# EAGLE board carberry01 (EAGLE 6.4)
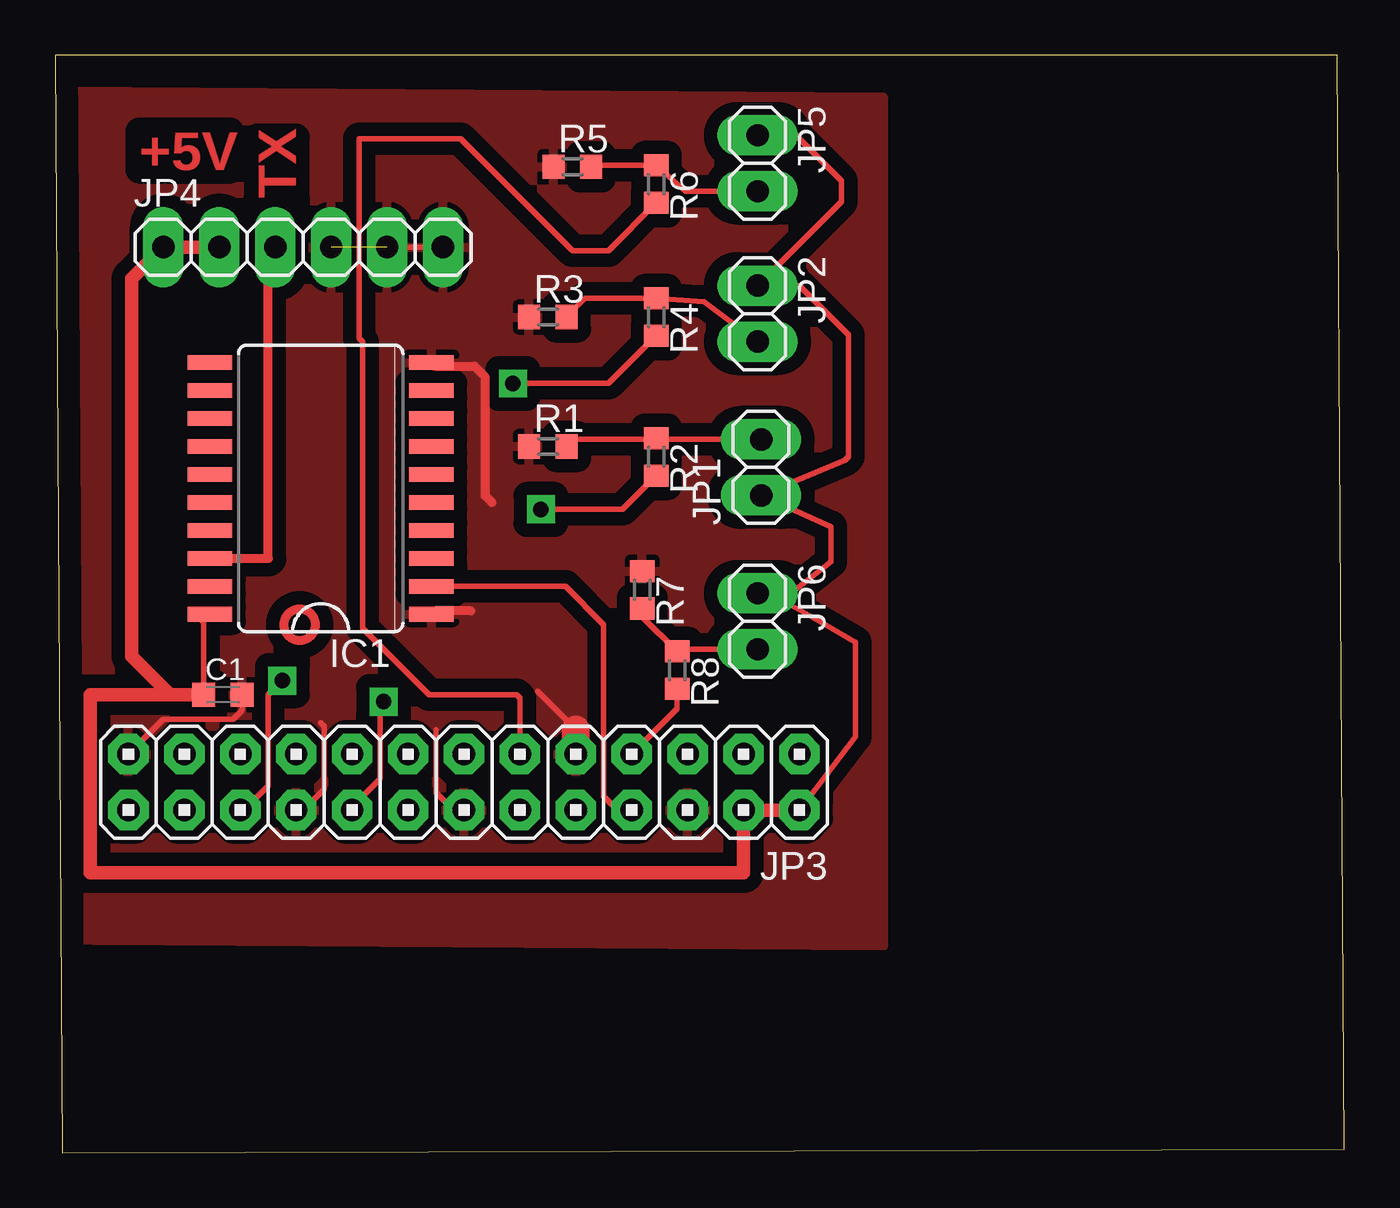
[diagram p0: board, top side]
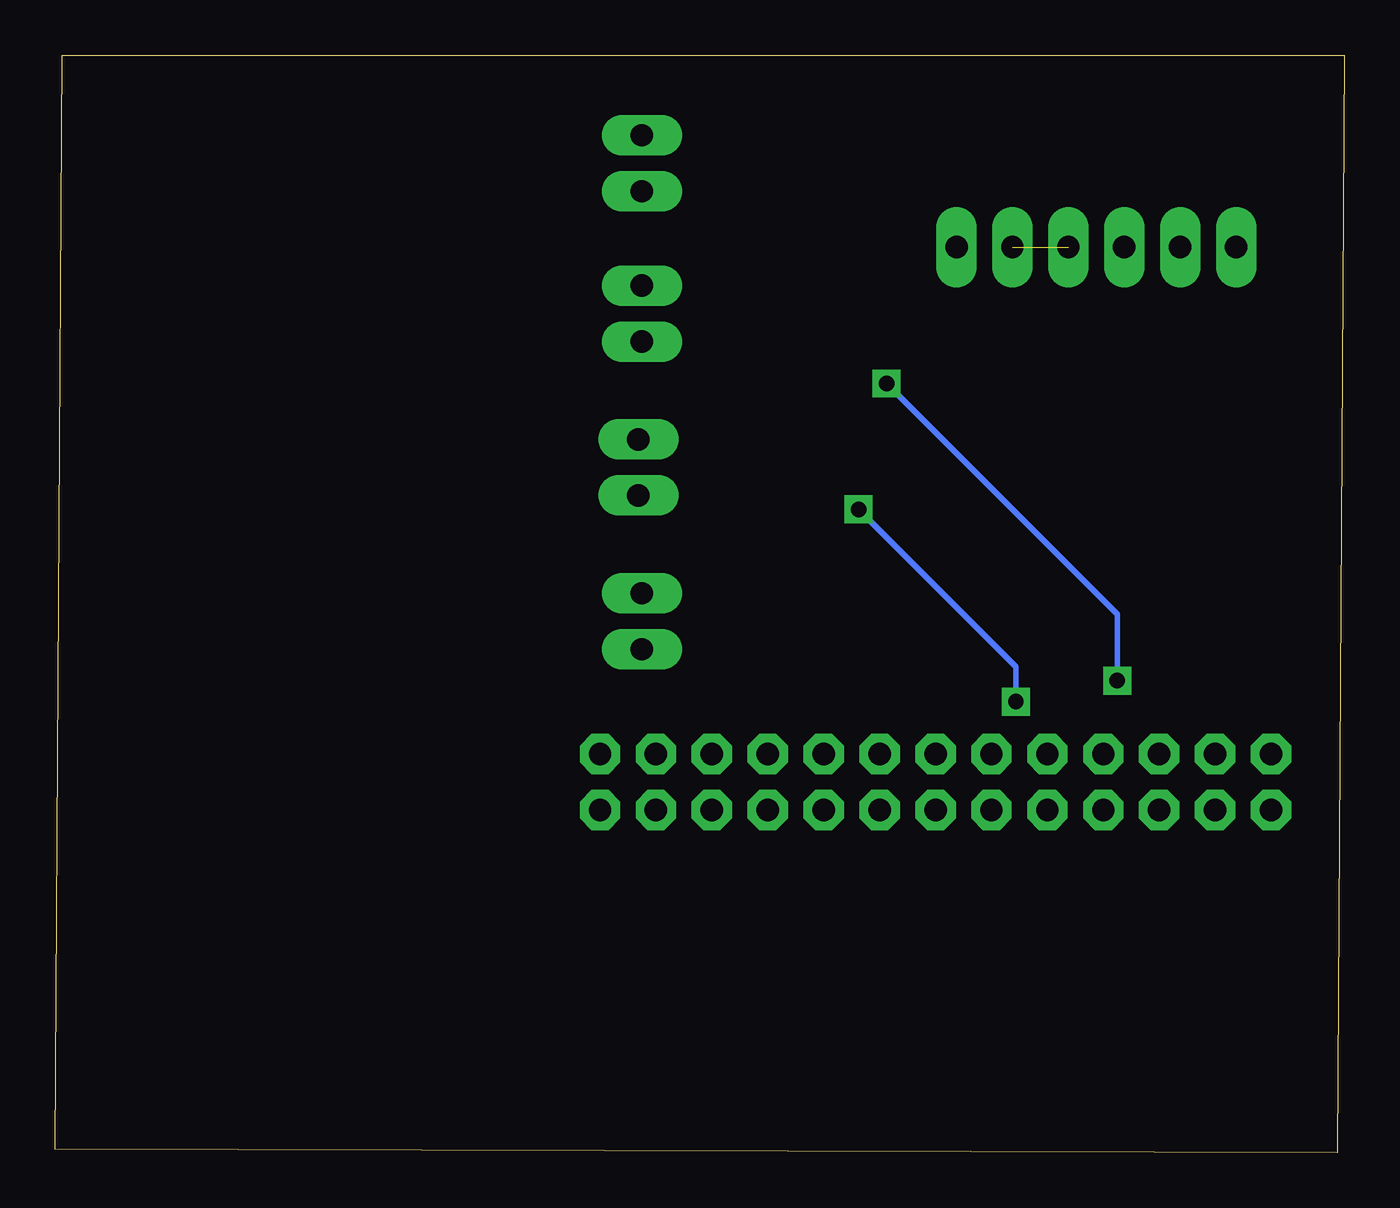
[diagram p1: board, bottom side, seen from below]

Size 58.57 x 49.84 mm. Coordinates in mm from the lower left corner, seen from the top.
Outline: 0.32,0 58.57,0.16 58.25,49.84 0,49.84 0.32,0
Copper layers (1*16): Top 0.035mm / dielectric 1.5mm / Bottom 0.035mm
Design rules "default *": minimum track width 10mil, minimum drill 24mil, track to track 8mil, track to pad 8mil, pad to pad 8mil, via to via 8mil, smd to smd 8mil, copper to edge 40mil, drill to drill 8mil, minimum pad ring 10mil, minimum via ring 8mil, stop-mask expansion 4mil, vias tented up to drill 0mil, thermal gap 10mil

## Footprints (pad centres in the part's own frame; a part is rotated, then mirrored left to right if it is on the bottom)
C0603K = smd 1.05 x 1.08: 1 -0.875,0; 2 0.875,0
SO20W = smd 0.66 x 2.032: 1 -5.715,-5.029; 2 -4.445,-5.029; 3 -3.175,-5.029; 4 -1.905,-5.029; 5 -0.635,-5.029; 6 0.635,-5.029; 7 1.905,-5.029; 8 3.175,-5.029; 9 4.445,-5.029; 10 5.715,-5.029; 11 5.715,5.029; 12 4.445,5.029; 13 3.175,5.029; 14 1.905,5.029; 15 0.635,5.029; 16 -0.635,5.029; 17 -1.905,5.029; 18 -3.175,5.029; 19 -4.445,5.029; 20 -5.715,5.029
1X02 = drill 1.016 long: 1 -1.27,0; 2 1.27,0
2X13 = drill 1.016 octagon: 1 -15.24,-1.27; 2 -15.24,1.27; 3 -12.7,-1.27; 4 -12.7,1.27; 5 -10.16,-1.27; 6 -10.16,1.27; 7 -7.62,-1.27; 8 -7.62,1.27; 9 -5.08,-1.27; 10 -5.08,1.27; 11 -2.54,-1.27; 12 -2.54,1.27; 13 0,-1.27; 14 0,1.27; 15 2.54,-1.27; 16 2.54,1.27; 17 5.08,-1.27; 18 5.08,1.27; 19 7.62,-1.27; 20 7.62,1.27; 21 10.16,-1.27; 22 10.16,1.27; 23 12.7,-1.27; 24 12.7,1.27; 25 15.24,-1.27; 26 15.24,1.27
1X06 = drill 1.016 long: 1 -6.35,0; 2 -3.81,0; 3 -1.27,0; 4 1.27,0; 5 3.81,0; 6 6.35,0
R0603 = smd 1 x 1.1: 1 -0.85,0; 2 0.85,0

## Placement (x,y rotation side)
C1  100nF  [C0603K]  7.62,20.8 0 top
IC1  74HCT244DW  [SO20W]  12.06,30.16 90 top
JP1  [1X02]  32.07,31.11 90 top
JP2  [1X02]  31.91,38.1 270 top
JP3  [2X13]  18.57,16.83 180 top
JP4  [1X06]  11.27,41.12 0 top
JP5  [1X02]  31.91,44.93 270 top
JP6  [1X02]  31.91,24.13 270 top
R1  10k  [R0603]  22.38,32.07 0 top
R2  1k  [R0603]  27.3,31.59 270 top
R3  10k  [R0603]  22.38,37.94 0 top
R4  1k  [R0603]  27.3,37.94 270 top
R5  10k  [R0603]  23.5,44.77 0 top
R6  1k  [R0603]  27.3,43.97 270 top
R7  10k  [R0603]  26.67,25.56 270 top
R8  1k  [R0603]  28.26,21.91 270 top

## Library data of the parts
C1 = resistor
IC1 = 74xx-eu
JP1-JP6 = pinhead
R1-R8 = eagle-ltspice; SPICEMODEL: NONE; SPICEPREFIX: R

## Nets
GND: C1.2 IC1.1 IC1.10 JP3.6 JP3.9 JP3.14 JP3.20 JP3.25 JP4.4 JP4.5 JP4.6 R1.1 R3.1 R5.1 R7.1
N$1: IC1.18 JP4.3
N$2: JP1.2 R1.2 R2.1
N$3: IC1.2 JP3.8
N$4: JP2.2 R3.2 R4.1
N$5: JP5.2 R5.2 R6.1
N$6: JP6.2 R7.2 R8.1
N$7: JP3.18 R2.2
N$8: JP3.22 R4.2
N$9: JP3.11 R6.2
N$10: JP3.7 R8.2
VCC: C1.1 IC1.20 JP1.1 JP2.1 JP3.2 JP3.4 JP4.1 JP4.2 JP5.1 JP6.1

## Tracks (layer width: path | path; a pad name or v marks a point on that pad's centre or on a via)
GND  (1 unrouted)
  Top 0.254: JP3.14 18.1,15.56 17.3,16.35 17.3,19.21 | JP3.20 11.27,15.56 12.22,16.51 12.22,19.37 12.06,19.53 | 23.65,19.21 21.91,20.96 | JP4.5 17.46,41.12 | 17.46,41.12 JP4.6 17.94,41.12 17.94,40.8 17.78,40.8 17.78,41.28 17.46,41.28 17.46,41.12 | JP3.25 4.92,19.69 8.1,19.69 8.49,20.08 C1.2
  Top 0.406: JP4.6 arc90 17.09,40.59 | IC1.10 arc90 17.25,35.72 19.05,35.72 19.53,35.24 19.53,29.85 19.84,29.53 | 18.89,24.61 17.25,24.61 IC1.1
  Top 1.27: JP3.9 23.65,19.21
  pour Top (isolate 0.61): -5.87,48.26 37.62,47.94 37.62,9.37 -8.1,9.68 -8.1,48.1
N$1
  Top 0.406: IC1.18 9.68,26.99 9.68,40.8 JP4.3
N$2
  Top 0.254: R2.1 27.36,32.39 | 27.36,32.39 27.94,32.39 JP1.2 | R1.2 23.55,32.39 27.36,32.39
N$3
  Top 0.254: IC1.2 23.18,25.72 24.92,23.97 24.92,16.19 25.56,15.56 JP3.8
N$4
  Top 0.254: R3.2 24.08,38.79 R4.1 29.47,38.63 JP2.2
N$5
  Top 0.254: R5.2 24.4,44.82 R6.1 28.63,43.66 JP5.2
N$6
  Top 0.254: 26.77,24.61 R7.2 26.67,24.35 R8.1 28.36,22.86 JP6.2
N$7  (via drill 0.7 pad 1.27)
  Top 0.254: R2.2 25.77,29.21 v22.07,29.21 | v14.92,20.48 14.76,20.32 14.76,16.99 13.49,15.72 JP3.18
  Bottom 0.254: v22.07,29.21 14.92,22.07 v14.92,20.48
N$8  (via drill 0.7 pad 1.27)
  Top 0.254: R4.2 25.14,34.93 v20.8,34.93 | v10.32,21.43 9.68,20.8 9.68,16.67 8.57,15.56 JP3.22
  Bottom 0.254: v20.8,34.93 10.32,24.45 v10.32,21.43
N$9
  Top 0.254: JP3.11 21.11,20.64 20.95,20.8 16.99,20.8 13.97,23.81 13.97,36.83 13.81,36.99 13.81,46.04 18.41,46.04 23.49,40.96 25.14,40.96 R6.2
N$10
  Top 0.254: R8.2 28.26,20.32 28.26,20.16 JP3.7
VCC
  Top 0.254: IC1.20 6.74,24.16 C1.1 6.74,24.05 6.51,24.29 | JP3.4 31.27,15.4 | 31.27,12.86 31.27,12.7 | 1.59,12.7 1.59,12.86 | JP6.1 31.91,25.08 33.02,25.08 | 33.02,25.08 35.24,26.83 35.24,28.42 JP1.1 35.88,31.43 36.04,31.59 36.04,37.15 33.81,39.37 JP2.1 35.72,43.18 35.72,44.13 33.65,46.2 JP5.1 | 33.02,25.08 34.45,24.29 36.35,23.18 36.35,18.89 JP3.2
  Top 0.61: JP4.2 JP4.1 3.49,39.69 3.49,22.54 5.24,20.8 | C1.1 5.24,20.8 | JP3.4 JP3.2 | 31.27,15.4 31.27,12.86 | 31.27,12.7 1.59,12.7 | 1.59,12.86 1.59,20.8 5.24,20.8
(copper drawn outside any net)
  shapes: Top circle x1

## Text on the board
Top: +5V | TX